# Altium PCB MCU_REVB.PcbDoc (part 2 of 2)
Units mil, origin at the board's own origin, x right, y up, seen from the top; angles counter-clockwise.
Board outline 3775 x 3976.97 mil, 4 copper layers (Top Layer, VCC_MCU_3V3, GND, Bottom Layer), stack 62.449 mil thick; 113 components, 143 nets, 484 pads, 119 vias.
Unrouted connection lines stored in the file: 108.
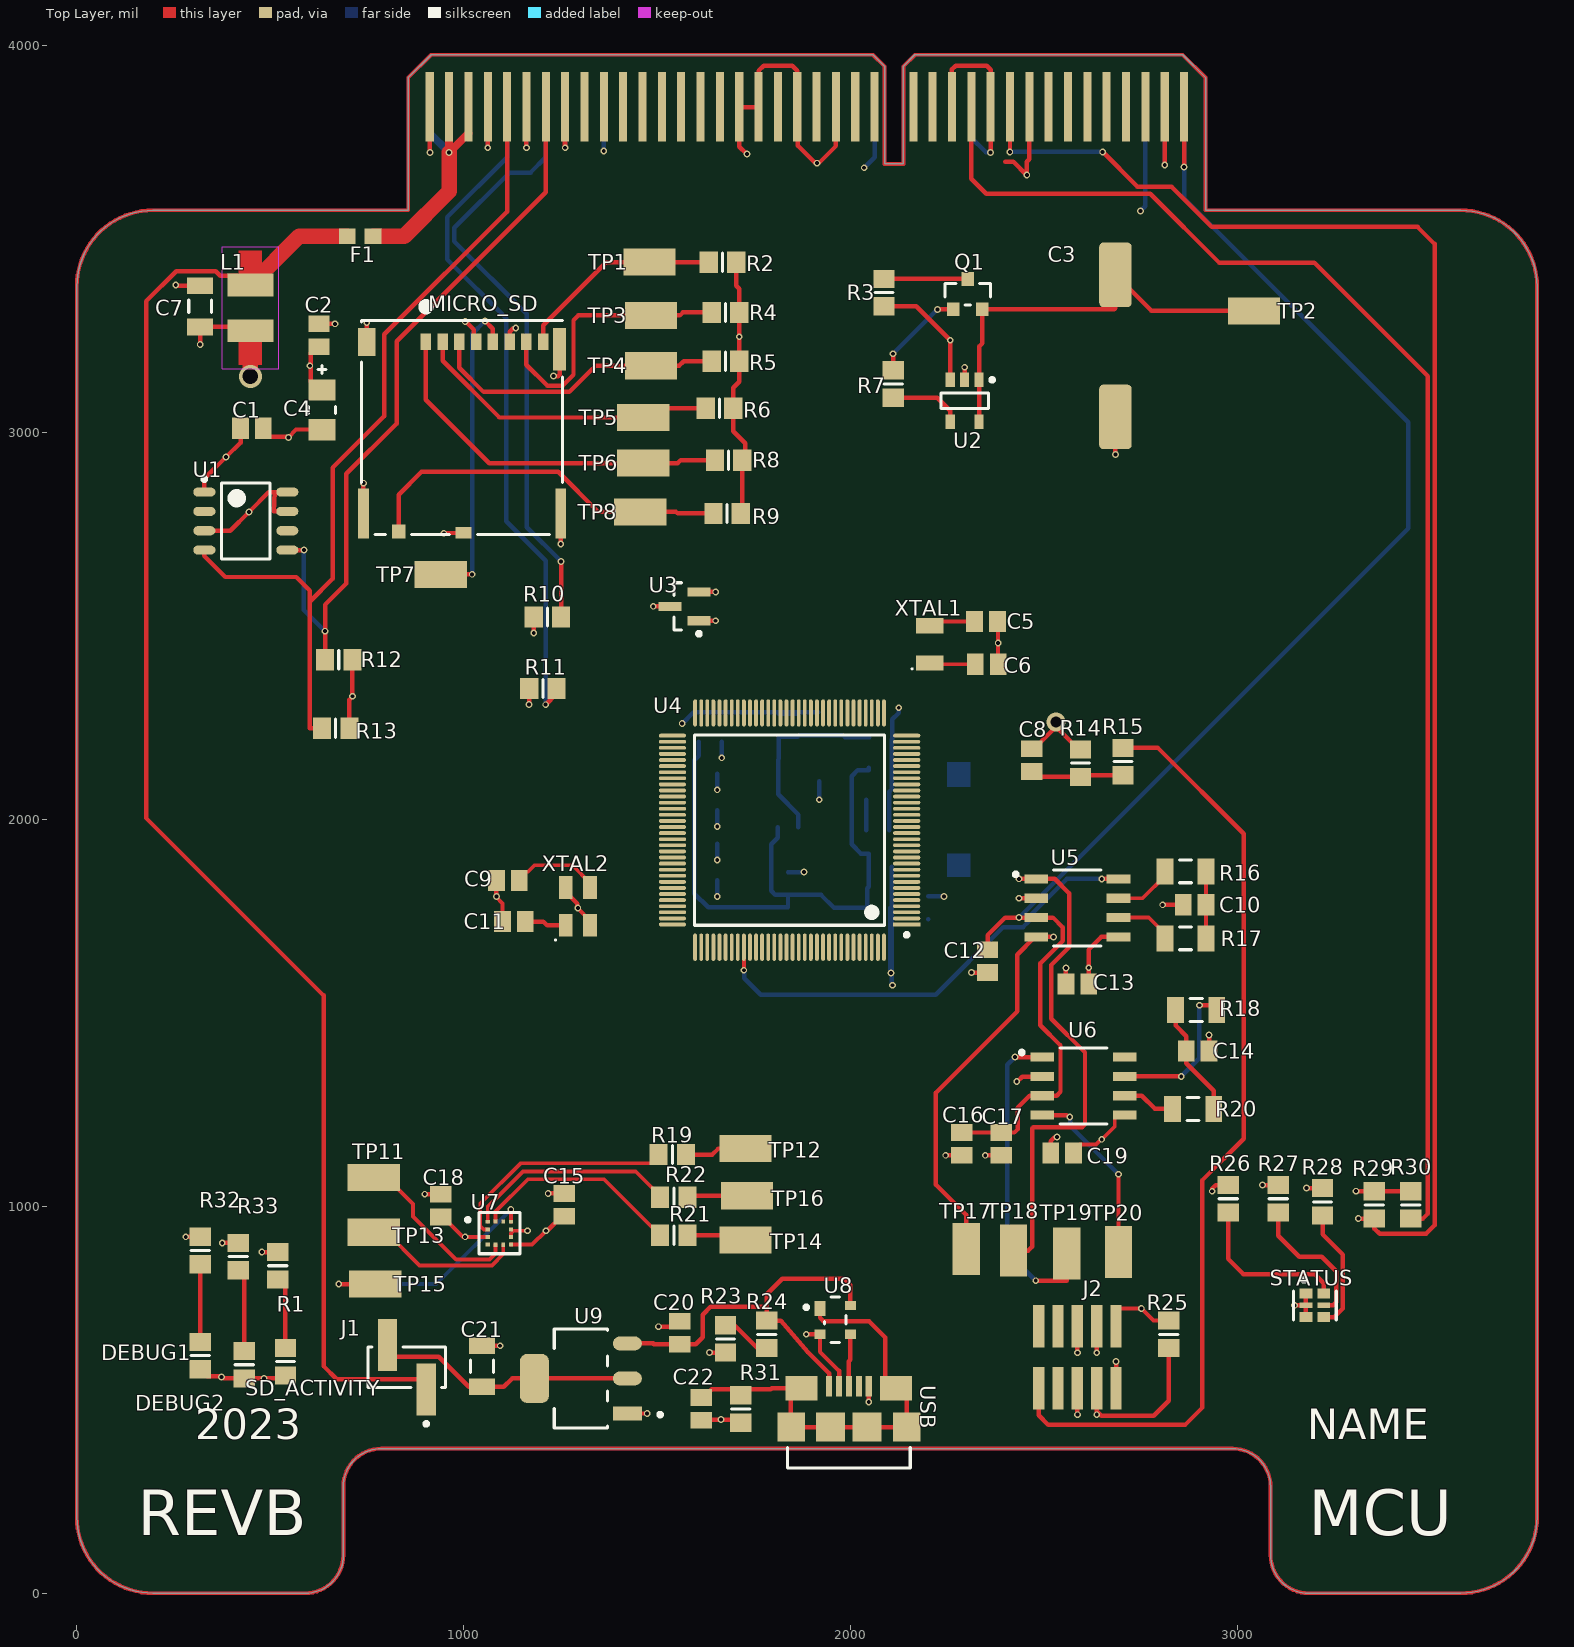
[diagram p0: Top Layer view]

## Via types
v1: diameter 17.5, hole 10, Top Layer to Bottom Layer, 115 vias
v2: diameter 17.48, hole 10, Top Layer to Bottom Layer, 2 vias
v3: diameter 59.06, hole 40, Top Layer to Bottom Layer, 1 vias
v4: diameter 50, hole 28, Top Layer to Bottom Layer, 1 vias

## Nets (pads, with @x,y where several pads share a name; then routed paths per layer and width w, separated by ;. In a path a pad name is that pad's centre, name@x,y a point inside that pad or via, vN(x,y) a via of type N, cw(c..) or ccw(c..) an arc to the next point about the centre after c; other vN are vias at no path point) (continued)
SCK: R11.1 U4.28 | length 41.3
  Top Layer w11.55: v1(1169.29,2297.27) R11.1
SD_ACTIVE_LED: R1.2 U4.122 | length 41.3
  Top Layer w11.55: v1(478.38,881.89) R1.2
SDCD: MICRO_SD.10 R9.1 TP8.1 U4.41 | length 978.4
  Top Layer w11.55: MICRO_SD.10 831.89,2839.84 891.05,2899 1244.28,2899 1348,2795.28 TP8.1 1549,2795.28 1552.94,2791.34 R9.1
SDCK: MICRO_SD.5 TP7.1 U4.40 | length 812.6
  Top Layer w11.55: TP7.1 v1(1022,2633.86) v1(1022.21,2633.86) ; v1(1055,3289) 1075.59,3268.41 MICRO_SD.5
  Bottom Layer w11.55: v1(1022,2633.86) 1022,3256 v1(1055,3289)
SDCMD: MICRO_SD.3 R5.1 TP4.1 U4.33 | length 778.7
  Top Layer w11.55: MICRO_SD.3 988.98,3168 1051.57,3105.41 1273.11,3105.41 1340.93,3173.23 TP4.1 1557,3173.23 1568.81,3185.04 R5.1
SDDAT0: MICRO_SD.7 R4.1 TP3.1 U4.34 | length 722.1
  Top Layer w11.55: MICRO_SD.7 1162.2,3175.75 1216,3121.96 1255.96,3121.96 1284,3150 1284,3291.15 1296,3303.15 TP3.1 1559,3303.15 1566.87,3311.02 R4.1
SDDAT1: MICRO_SD.8 R2.1 TP1.1 U4.35 | length 538.5
  Top Layer w11.55: MICRO_SD.8 1205.51,3277.51 1368.94,3440.94 TP1.1 R2.1
SDDAT2: MICRO_SD.1 R8.1 TP6.1 U4.36 | length 968.4
  Top Layer w11.55: MICRO_SD.1 902.36,3085 1066.1,2921.26 TP6.1 1553,2921.26 1560.87,2929.13 R8.1
SDDAT3: MICRO_SD.2 R6.1 TP5.1 U4.39 | length 799.7
  Top Layer w11.55: MICRO_SD.2 945.67,3186.33 1092.63,3039.37 TP5.1 1488.19,3062.99 R6.1
SPI1_MISO: R22.2 TP16.1 U4.84 | length 153.5
  Top Layer w11.55: R22.2@1578.74,1027.56 TP16.1
SPI1_MOSI: R19.2 TP12.1 U4.82 | length 160.1
  Top Layer w11.55: R19.2 1643,1133.86 1658.75,1149.61 TP12.1
SPI1_SCK: R21.2 TP14.1 U4.83 | length 85.6
  Top Layer w11.55: R21.2 TP14.1@1664.37,925.2
SPI_MISO: pad.62 U4.29
SPI_MOSI: pad.66 R10.2 | length 1562.8
  Top Layer w11.55: R10.2 v1(1252,2667)
  Bottom Layer w11.55: pad.66 1212.48,3712 1172.96,3672.48 1118.95,3672.48 976,3529.53 976,3494.47 1163,3307.47 1163,2756 v1(1252,2667)
SPI_SCK: pad.70 R11.2 | length 1768
  Top Layer w11.55: v1(1212,2297) 1240.16,2325.16 R11.2
  Bottom Layer w11.55: pad.70 1112.48,3712 958,3557.52 958,3448 1110,3296 1110,2771.26 1212,2669.26 v1(1212,2297)
STAT_B: R26.2 U4.85 | length 52.1
  Top Layer w11.55: v1(2935.07,1039.12) 2935.07,1046.19 2944,1055.12 R26.2
STAT_G: R27.2 U4.86 | length 41.3
  Top Layer w11.55: v1(3064.99,1055.12) R27.2
STAT_R: R28.2 U4.87 | length 41.3
  Top Layer w11.55: v1(3179.16,1047.24) R28.2
SWDCLK: J2.4 R25.1 U4.119 | length 411.7
  Top Layer w11.55: v1(2636.61,461.57) 2636.61,470.39 ; J2.4 2636.61,470.39 ; R25.1 2822.83,497.83 2784,459 2648,459 2636.61,470.39
SWDIO: J2.2 U4.120 | length 68.7
  Top Layer w11.55: J2.2 v1(2686.61,598.91)
SWO: J2.6 U4.121 | length 68.7
  Top Layer w11.55: v1(2586.61,461.57) J2.6
TEMP_SENSE: U3.2 U4.13 | length 43.3
  Top Layer w11.55: U3.2 v1(1651.55,2588.58)
TEMP_SENSE_VDD: U3.1 U4.30 | length 43.3
  Top Layer w11.55: U3.1 v1(1651.55,2513.78)
UART0_RX: pad.61 U4.67
UART0_TX: pad.59 U4.66
UART1_RX: pad.57 U4.70
UART1_TX: pad.55 U4.71
UART2_RX: pad.53 U4.76
UART2_TX: pad.51 U4.77
UART3_RX: pad.49 U4.102
UART3_TX: pad.47 U4.103
USB_N: U4.94 U8.2 USB.2 | length 190.7
  Top Layer w11.55: v1(1885.83,669.29) U8.2 1921.26,623.74 1970.47,574.53 USB.2
USB_P: U4.95 U8.3 USB.3 | length 136.5
  Top Layer w11.55: USB.3 1996.06,599 2000,602.94 U8.3
V_USB: C20.1 R24.2 U8.4 U9.3 USB.1 | length 1053.7
  Top Layer w11.55: U9.3 1490,645.67 1491.97,643.7 C20.1 1600,643.7 1618,661.7 1618,720 1639,741 1778.46,741 1783.46,736 ; USB.1 1944.88,568.12 1890,623 1820.28,704.72 R24.2 1783.46,736 ; U8.4 2000,797 1984,813 1824,813 1783.46,772.46 1783.46,736
V_USB_SENSE: R23.2 R24.1 U4.3 | length 130.8
  Top Layer w11.55: R23.2 1700,692.91 1759.06,633.86 R24.1
VBAT: C3.1 Q1.2 TP2.1 U2.1 U2.5 U4.128 | length 1122.3
  Top Layer w11.55: U2.5 U2.1 2332.68,3223 2340.55,3230.87 Q1.2 2681.94,3318.9 2685.04,3322 C3.1 2778.15,3314.96 TP2.1
VCC_MCU_3V3: C1.1 C2.1 C4.2 C7.1 C8.1 C13.2 C15.1 C18.1 C19.2 C100.1 C101.1 C102.1 C103.1 C104.1 C105.1 C108.1 C110.1 C111.1 C115.1 FB100.1 J2.1 L1.2 MICRO_SD.4 R2.2 R3.1 R4.2 R5.2 R6.2 R8.2 R9.2 R12.2 R13.2 R14.2 R25.2 R29.2 R30.2 U1.1 U2.3 U4.32 U4.37 U4.46 U4.54 U4.65 U4.79 U4.91 U4.97 U4.107 U4.118 U5.5 U6.5 U7.3 U7.7 | length 4627.5
  Top Layer w9.45: v1(1003.94,921.26) v1@1004.23,920.96
  Top Layer w10: C18.1 946.85,972.44 998.32,920.96 v1@1004.23,920.96 ; v1@1004.43,920.77 U7.3 ; U7.7 1177.2,901.08 1212.6,936.48 v1(1212.6,937.01) ; C19.2 2576.77,1143.7 2593.43,1160.36 2634.71,1160.36 2647.58,1173.23 v1(2649.61,1173.23) 2683.15,1206.77 2683.15,1229.21 2689.96,1236.02 U6.5 ; J2.1 2686.61,726.66 2696.18,736.22 v1(2751.97,736.22) 2783.47,704.72 R25.2
  Top Layer w11.55: v1(318.9,3228.35) C7.1 438.97,3273.62 L1.2 ; U1.1 329.72,2880.91 v1(385.83,2937.01) 423.23,2974.41 C1.1 ; C2.1 620.08,3222.44 604.2,3206.56 604.2,3176.68 602.36,3174.84 602.36,3171.62 604.2,3169.78 604.2,3132.02 625.98,3110.24 C4.2 ; R13.2 704.73,2309.42 712.6,2317.29 v1(712.6,2318.9) R12.2 ; v1(1003.94,3287.4) 1005.55,3287.4 1026.68,3266.27 1026.68,3240.64 MICRO_SD.4 ; v1(1212.6,937.01) 1213.74,938.15 1217.67,938.15 1253.94,974.41 C15.1 ; R2.2 1704.73,3379.87 1712.6,3372 R4.2 v1(1712.6,3248.03) R5.2 1712.6,3131.75 1696.85,3116 R6.2 1696.85,3003.94 1728.35,2972.44 1728.35,2937.01 R8.2 1720.47,2795.27 R9.2 ; R3.1 2170.23,3326.77 v1(2257.87,3239.13) U2.3 ; C8.1 2474.41,2183.07 v4@2531.5,2240.16 ; v4(2531.5,2251.97) v4@2531.5,2240.16 ; R14.2 2590.55,2181.1 v4@2531.5,2240.16 ; v1(2616,1617) v1@2616.14,1616.86 ; C13.2 v1@2616.14,1616.86 ; U5.5 2648.8,1696.65 2616.14,1664 v1@2616.14,1616.86 ; v1(3307.09,1039.37) R29.2 3401,1039.37 R30.2
  Top Layer w40: v3(448.82,3145.67) L1.2
  Bottom Layer w11.55: C115.1 1608.27,2164.81 1596.46,2153 C111.1 C108.1 C105.1 C101.1 1596.46,1808.54 1632,1773 1838.58,1773 C103.1 ; FB100.1 1812.01,1952.78 1795,1935.78 1795,1816 1805.88,1805.12 C103.1 ; C110.1 2047.24,2128 2019,2128 2003,2112 2003,1936 2027,1912 2047.24,1912 C104.1 2047.24,1825.94 2043.31,1822 C102.1 1957.46,1771.65 1924,1805.12 C103.1 ; C100.1 C100.1@2201,1742.13
  other v1: 602.36,3173.23
VCC_MCU_ANA: C109.1 C112.1 C113.1 C114.1 FB100.2 U4.6 U4.10 U4.15 U4.26 | length 495
  Bottom Layer w11.55: FB100.2 1865.16,2013 1812.99,2065.16 C109.1 1812.99,2155 1814.96,2156.97 C113.1 1864,2214.57 1867.94,2218.5 C112.1 1980,2218.5 1985.91,2212.6 C114.1
VCC_MCU_VDDCORE: C106.1 C107.1 L100.2 U4.115 | length 78.7
  Bottom Layer w11.55: C106.1 C107.1
VCC_MCU_VSW: L100.1 U4.117
XIN0: C9.2 U4.62 XTAL2.3 | length 233.5
  Top Layer w10: C9.2 1143.7,1848.43 1160.36,1865.08 1166.26,1865.08 1183.07,1881.89 1281.3,1881.89 1326.77,1836.42 XTAL2.3
XIN32: C6.2 U4.1 XTAL1.1 | length 119.3
  Top Layer w10: XTAL1.1 2207.68,2401.57 C6.2
XOUT0: C11.2 U4.63 XTAL2.1 | length 108.3
  Top Layer w11.55: C11.2 1206,1736.22 1215.65,1726.58 XTAL2.1
XOUT32: C5.2 U4.2 XTAL1.2 | length 120.6
  Top Layer w10: XTAL1.2 2215.55,2511.81 C5.2
pads on no net: U7.11

## Polygon pours and split planes (outlines as drawn)
no net on GND (split plane): 298 vertices, not listed, extent 20.03,20.03 3754.97,3956.87
VCC_MCU_3V3 on VCC_MCU_3V3 (split plane): 298 vertices, not listed, extent 20.03,20.03 3754.97,3956.87

## Other copper
Multi-Layer:
  the board outline again, w10

## Silkscreen, mask and mechanical layers (free items; w line width, h text height)
Top Overlay:
  text "2023" at 305.87,397.64 h78.74
  text "NAME" at 3180.51,397.64 h78.74
  text "REVB" at 157.31,149.92 h118.11
  text "MCU" at 3184.76,149.92 h118.11
Bottom Overlay:
  text "LED->" at 892.8,3486.38 h39.37 r270

## Text inside footprints (layer, text, board x,y; h text height)
J2: Mechanical 59 "3.429" at 2982.59,615.24 h20 r180; Mechanical 59 "4.064" at 2910.11,615.24 h20 r180; Mechanical 59 "1.270" at 2790.11,420.24 h20 r180; Mechanical 59 "6.350" at 2612.59,565.24 h20 r180; Mechanical 59 "5.080" at 2612.59,380.24 h20 r180; Mechanical 59 "2.794" at 2432.59,535.24 h20 r180; Mechanical 59 "0.762" at 2420.11,447.72 h20 r180; Mechanical 7 "1" at 2784.68,722.25 h20 r180; Mechanical 7 "2" at 2784.68,548.23 h20 r180; Mechanical 7 "9" at 2420.04,722.25 h20 r180; Mechanical 7 "10" at 2420.04,548.23 h20 r180; Mechanical 3 "1" at 2784.68,722.25 h20 r180; Mechanical 3 "2" at 2784.68,548.23 h20 r180; Mechanical 3 "9" at 2420.04,722.25 h20 r180; Mechanical 3 "10" at 2420.04,548.23 h20 r180